# EAGLE board ModulePlatform (EAGLE 7.7.0)
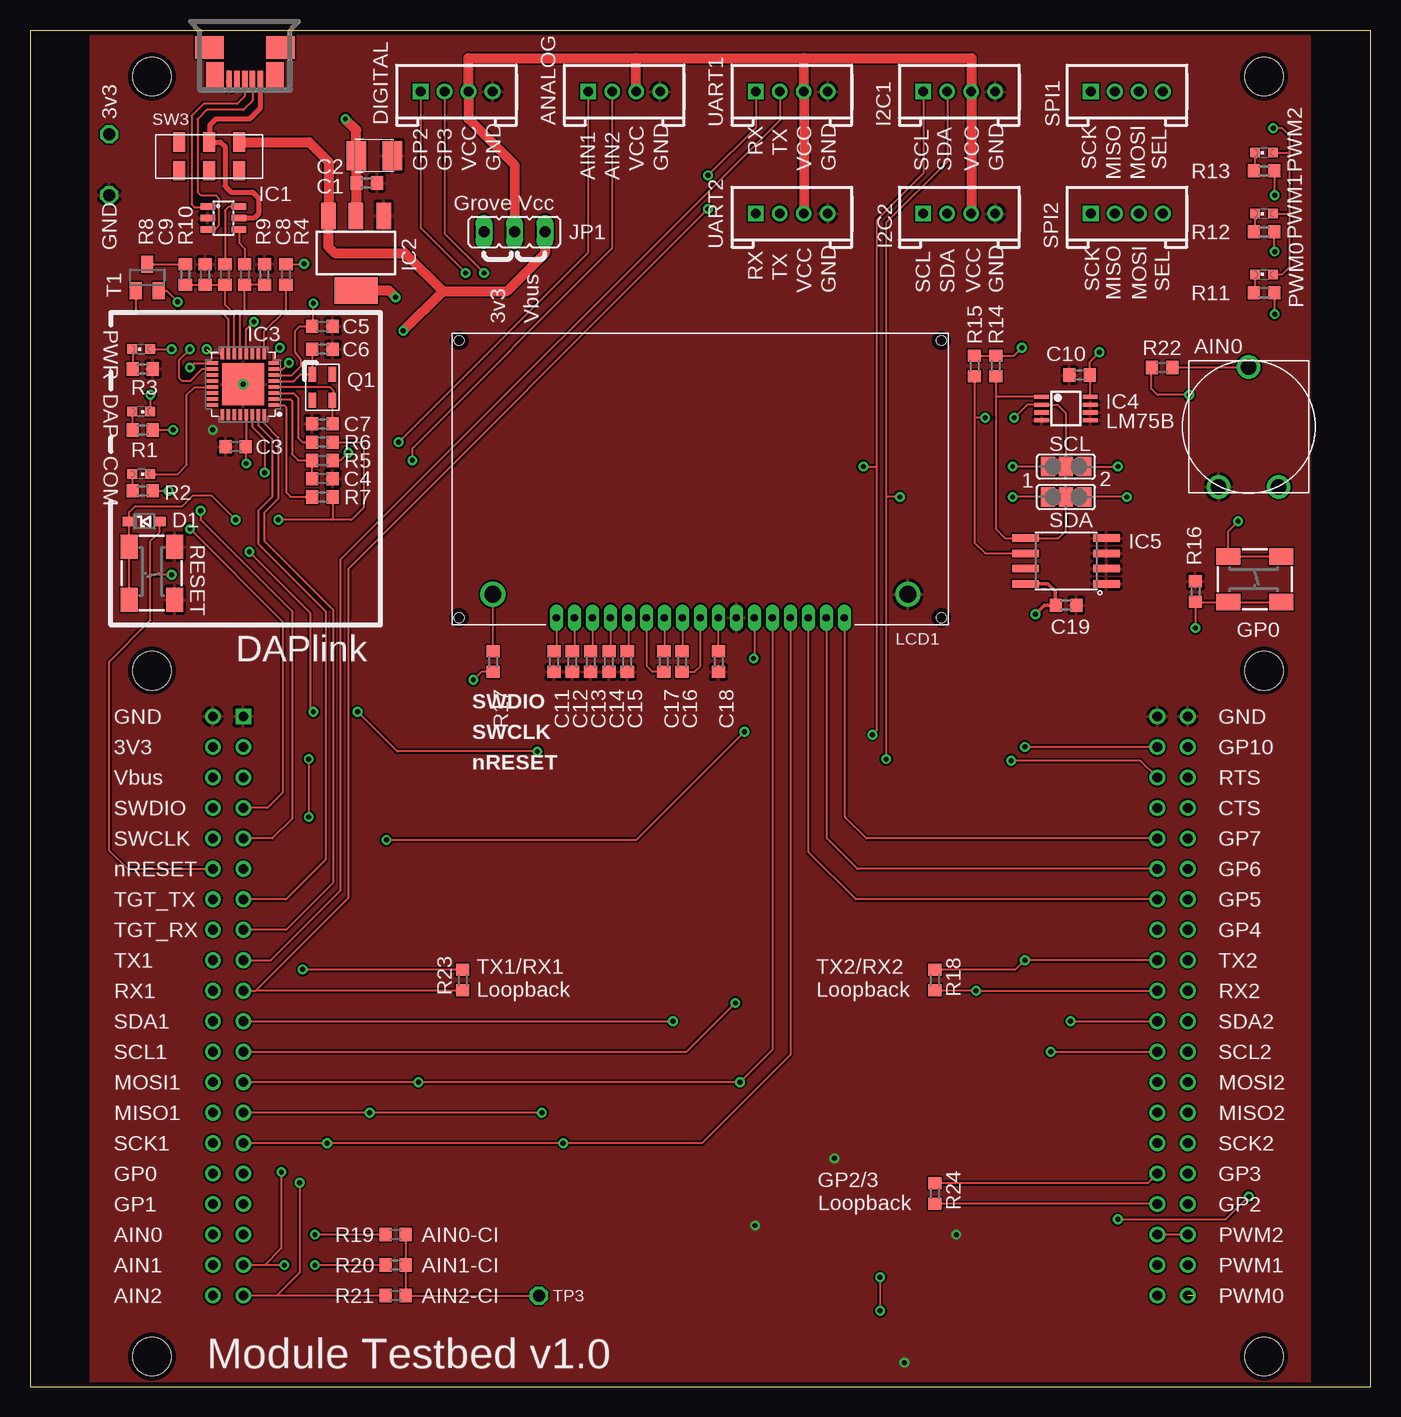
[diagram p0: board, top side]
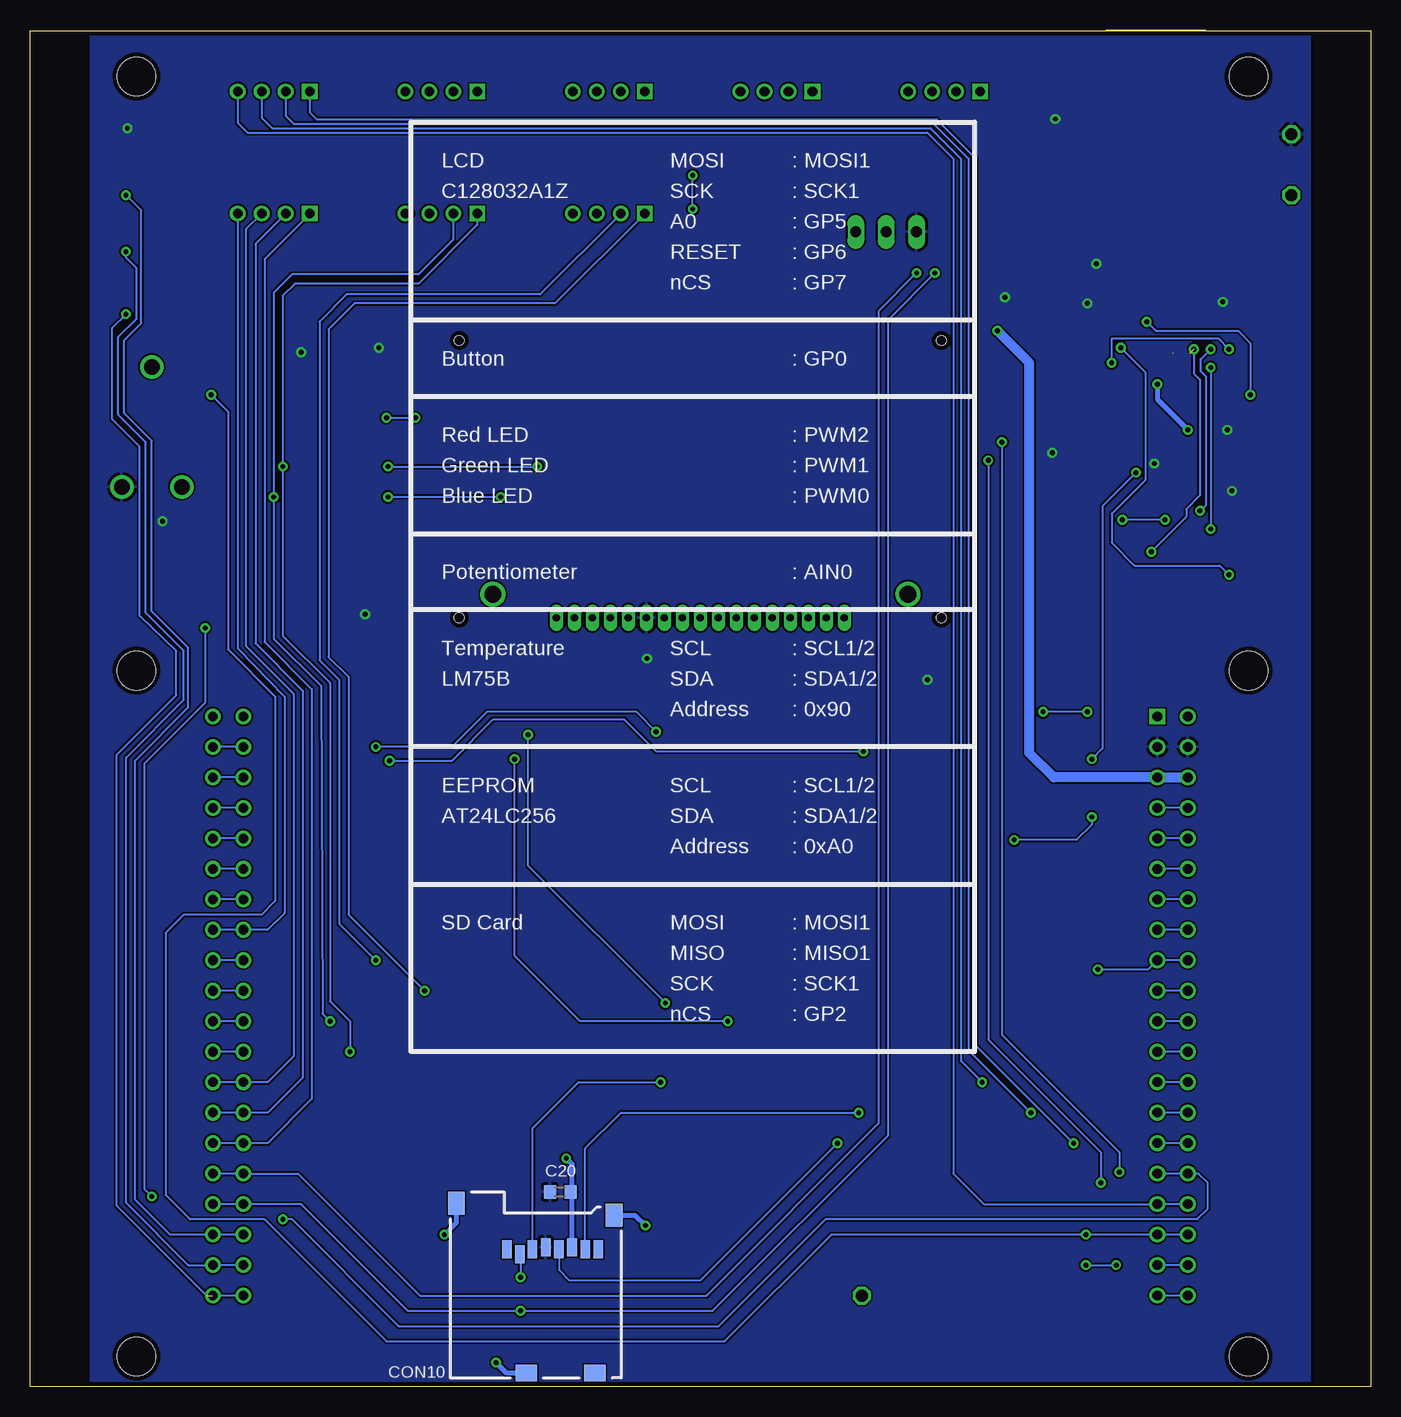
[diagram p1: board, bottom side, seen from below]

Size 111.76 x 113.08 mm. Coordinates in mm from the lower left corner, seen from the top.
Outline: 0,0 111.76,0 111.76,113.03 0,113.03 0,0
Copper layers ((1*16)): Top 0.035mm / dielectric 0.8mm / Bottom 0.035mm
Design rules "mbed-HDK-6-6-2-layer": minimum track width 6mil, minimum drill 9mil, track to track 6mil, track to pad 6mil, pad to pad 6mil, via to via 6mil, smd to smd 6mil, copper to edge 15mil, drill to drill 8mil, minimum pad ring 10mil, minimum via ring 8mil, stop-mask expansion 4mil, vias tented up to drill 0mil, thermal gap 10mil
Holes 3.2 mm at 10.16,2.54 10.16,109.22 102.87,2.54 102.87,109.22 10.16,59.69 102.87,59.69

## Footprints (pad centres in the part's own frame; a part is rotated, then mirrored left to right if it is on the bottom)
0603 = smd 1 x 1.1: 1 -0.85,0; 2 0.85,0
SMC_B = smd 1.6 x 2.4: + -1.5,0; - 1.5,0
HW4-2.0 = drill 0.8 pad 1.27 square: 1 -3,0 | drill 0.8 pad 1.27: 2 -1,0; 3 1,0; 4 3,0
MOLEX-47364-0001 = smd 1.7 x 0.45: 4 2.8,-0.65; D+ 2.8,0; D- 2.8,0.65; GND 2.8,-1.3; VBUS 2.8,1.3 | smd 1.9 x 2.375: GND1 0,2.95; GND4 0,-2.95 | smd 2.1 x 1.475: GND2 2.3,2.5; GND3 2.3,-2.5
AMPHENOL-101-00660-68-6 = smd 0.8 x 1.5: 1 -2.55,10.7; 2 -1.45,10.3; 3 -0.4,10.7; 4 0.7,10.9; 5 1.8,10.7; 6 2.9,10.9; 7 4,10.7; 8 5.1,10.7 | smd 1.8 x 1.4: CD 4.8,0.4; G1 -0.9,0.4 | smd 1.4 x 1.9: G2 6.4,13.55; G3 -6.75,14.55
BAT60A = smd 1 x 0.8: A 1.3,0; K -1.3,0
SOT23-6L = smd 0.55 x 1.2: 1 -0.95,-1.3; 2 0,-1.3; 3 0.95,-1.3; 4 0.95,1.3; 5 0,1.3; 6 -0.95,1.3
SOT223 = smd 1.219 x 2.235: 1 -2.311,-3.099; 2 0,-3.099; 3 2.311,-3.099 | smd 3.6 x 2.2: 4 0,3.099
SOT617-3 = smd 0.9 x 0.29: 1 -2.55,1.75; 2 -2.55,1.25; 3 -2.55,0.75; 4 -2.55,0.25; 5 -2.55,-0.25; 6 -2.55,-0.75; 7 -2.55,-1.25; 8 -2.55,-1.75; 17 2.55,-1.75; 18 2.55,-1.25; 19 2.55,-0.75; 20 2.55,-0.25; 21 2.55,0.25; 22 2.55,0.75; 23 2.55,1.25; 24 2.55,1.75 | smd 0.29 x 0.9: 9 -1.75,-2.55; 10 -1.25,-2.55; 11 -0.75,-2.55; 12 -0.25,-2.55; 13 0.25,-2.55; 14 0.75,-2.55; 15 1.25,-2.55; 16 1.75,-2.55; 25 1.75,2.55; 26 1.25,2.55; 27 0.75,2.55; 28 0.25,2.55; 29 -0.25,2.55; 30 -0.75,2.55; 31 -1.25,2.55; 32 -1.75,2.55 | smd 3.5 x 3.5: 33 0,0
TSSOP8 = smd 1.2 x 0.35: 1 -2.025,0.975; 2 -2.025,0.325; 3 -2.025,-0.325; 4 -2.025,-0.975; 5 2.025,-0.975; 6 2.025,-0.325; 7 2.025,0.325; 8 2.025,0.975
SO08-EIAJ = smd 0.61 x 2.21: 1 -1.905,-3.378; 2 -0.635,-3.378; 3 0.635,-3.378; 4 1.905,-3.378; 5 1.905,3.353; 6 0.635,3.353; 7 -0.635,3.353; 8 -1.905,3.353
JP2 = drill 0.914 long: 1 -2.54,0; 2 0,0; 3 2.54,0
C12832A1Z = drill 1.4: A 3.4,2.55; K 38,2.55 | drill 0.6 long: P$1 8.7,0.6; P$2 10.2,0.6; P$3 11.7,0.6; P$4 13.2,0.6; P$5 14.7,0.6; P$6 16.2,0.6; P$7 17.7,0.6; P$8 19.2,0.6; P$9 20.7,0.6; P$10 22.2,0.6; P$11 23.7,0.6; P$12 25.2,0.6; P$13 26.7,0.6; P$14 28.2,0.6; P$15 29.7,0.6; P$16 31.2,0.6; P$17 32.7,0.6 | hole 0.8: 0.6,0.6; 40.8,0.6; 40.8,23.7; 0.6,23.7
CHIPLED_0603 = smd 0.8 x 0.8: A 0,-0.75; C 0,0.75
3.2X.2.5 = smd 1.27 x 0.635: P$1 -1.092,-0.838; P$2 1.092,-0.838; P$3 1.092,0.838; P$4 -1.092,0.838
0603@1 = smd 1 x 1.1: 1 -0.85,0; 2 0.85,0
SJ_2 = smd 1.168 x 1.6: 1 -1.524,0; 2 0,0; 3 1.524,0
MODULE_SOCKET = drill 0.8 square: 1 0,0 | drill 0.8: 2 0,-2.54; 3 0,-5.08; 4 0,-7.62; 5 0,-10.16; 6 0,-12.7; 7 0,-15.24; 8 0,-17.78; 9 0,-20.32; 10 0,-22.86; 11 0,-25.4; 12 0,-27.94; 13 0,-30.48; 14 0,-33.02; 15 0,-35.56; 16 0,-38.1; 17 0,-40.64; 18 0,-43.18; 19 0,-45.72; 20 0,-48.26; 21 76.2,-48.26; 22 76.2,-45.72; 23 76.2,-43.18; 24 76.2,-40.64; 25 76.2,-38.1; 26 76.2,-35.56; 27 76.2,-33.02; 28 76.2,-30.48; 29 76.2,-27.94; 30 76.2,-25.4; 31 76.2,-22.86; 32 76.2,-20.32; 33 76.2,-17.78; 34 76.2,-15.24; 35 76.2,-12.7; 36 76.2,-10.16; 37 76.2,-7.62; 38 76.2,-5.08; 39 76.2,-2.54; 40 76.2,0; P$41 -2.54,0; P$42 -2.54,-2.54; P$43 -2.54,-5.08; P$44 -2.54,-7.62; P$45 -2.54,-10.16; P$46 -2.54,-12.7; P$47 -2.54,-15.24; P$48 -2.54,-17.78; P$49 -2.54,-20.32; P$50 -2.54,-22.86; P$51 -2.54,-25.4; P$52 -2.54,-27.94; P$53 -2.54,-30.48; P$54 -2.54,-33.02; P$55 -2.54,-35.56; P$56 -2.54,-38.1; P$57 -2.54,-40.64; P$58 -2.54,-43.18; P$59 -2.54,-45.72; P$60 -2.54,-48.26; P$61 78.74,-48.26; P$62 78.74,-45.72; P$63 78.74,-43.18; P$64 78.74,-40.64; P$65 78.74,-38.1; P$66 78.74,-35.56; P$67 78.74,-33.02; P$68 78.74,-30.48; P$69 78.74,-27.94; P$70 78.74,-25.4; P$71 78.74,-22.86; P$72 78.74,-20.32; P$73 78.74,-17.78; P$74 78.74,-15.24; P$75 78.74,-12.7; P$76 78.74,-10.16; P$77 78.74,-7.62; P$78 78.74,-5.08; P$79 78.74,-2.54; P$80 78.74,0
TP-1154X = smd 2 x 1.4: A1 -2.2,1.9; A2 2.2,1.9; B1 -2.2,-1.9; B2 2.2,-1.9
JS202011JCQN = smd 1 x 1.6: 1 0,2.4; 2 2.5,2.4; 3 5,2.4; 5 0,0; 6 2.5,0; 7 5,0
SOT23 = smd 1 x 1.4: 1 -0.95,-1.1; 2 0.95,-1.1; 3 0,1.1
TP50-PTH = drill 1 octagon: TP 0,0
CA14V = drill 1.3: P$1 -2.5,-5; P$2 0,5; P$3 2.5,-5

## Placement (x,y rotation side)
C1  100nF  [0603]  28.07,100.33 0 top
C2  10uF  [SMC_B]  28.7,102.62 0 top
C3  100nF  [0603]  17.15,78.36 180 top
C4  100nF  [0603]  24.38,75.69 0 top
C5  100nF  [0603]  24.38,88.39 0 top
C6  18pF  [0603]  24.38,86.49 0 top
C7  18pF  [0603]  24.38,80.26 180 top
C8  18pF  [0603]  19.56,92.71 90 top
C9  18pF  [0603]  14.61,92.71 90 top
C10  100nF  [0603]  87.5,84.33 180 top
C11  100nF  [0603]  43.69,60.45 270 top
C12  100nF  [0603]  45.21,60.45 270 top
C13  100nF  [0603]  46.74,60.45 270 top
C14  100nF  [0603]  48.26,60.45 270 top
C15  100nF  [0603]  49.78,60.45 270 top
C16  100nF  [0603]  54.36,60.45 90 top
C17  100nF  [0603]  52.83,60.45 270 top
C18  100nF  [0603]  57.4,60.45 270 top
C19  100nF  [0603]  86.36,65.15 0 top
C20  100nF  [0603]  67.56,16.26 0 bottom
CON1  GROVE-SPI-PTH  [HW4-2.0]  91.44,107.95 0 top
CON2  GROVE-UART-I2C-PTH  [HW4-2.0]  63.5,107.95 0 top
CON3  GROVE-A/D-PTH  [HW4-2.0]  49.53,107.95 0 top
CON4  GROVE-A/D-PTH  [HW4-2.0]  35.56,107.95 0 top
CON5  GROVE-UART-I2C-PTH  [HW4-2.0]  77.47,107.95 0 top
CON6  GROVE-UART-I2C-PTH  [HW4-2.0]  63.5,97.79 0 top
CON7  GROVE-SPI-PTH  [HW4-2.0]  91.44,97.79 0 top
CON8  GROVE-UART-I2C-PTH  [HW4-2.0]  77.47,97.79 0 top
CON9  USB_MICROB  [MOLEX-47364-0001]  17.91,111.63 270 top
CON10  MICRO-SD  [AMPHENOL-101-00660-68-6]  69.47,0.76 0 bottom
D1  BAT60A  [BAT60A]  9.53,72.14 0 top
IC1  USBLC6-2SC6  [SOT23-6L]  16.13,97.41 270 top
IC2  LD1117S33  [SOT223]  27.18,94.49 180 top
IC3  LPC11U35FHI33/501  [SOT617-3]  17.78,83.57 180 top
IC4  LM75BD_TSSOP8  [TSSOP8]  86.36,81.53 0 top
IC5  AT24LCXXXEIAJ  [SO08-EIAJ]  86.36,68.83 90 top
JP1  [JP2]  40.39,96.27 180 top
LCD1  C12832A1Z  [C12832A1Z]  35.18,63.5 0 top
LED1  BLUE  [CHIPLED_0603]  9.27,81.28 270 top
LED2  GREEN  [CHIPLED_0603]  9.27,76.07 270 top
LED3  RED  [CHIPLED_0603]  9.27,86.49 90 top
LED4  RED  [CHIPLED_0603]  102.87,92.71 90 top
LED5  BLUE  [CHIPLED_0603]  102.87,97.79 90 top
LED6  GREEN  [CHIPLED_0603]  102.87,102.87 90 top
Q1  12MHz  [3.2X.2.5]  24.38,83.31 270 top
R1  470R  [0603@1]  9.4,79.76 180 top
R2  470R  [0603@1]  9.4,74.68 180 top
R3  470R  [0603@1]  9.4,84.84 180 top
R4  10k  [0603@1]  21.34,92.71 90 top
R5  10k  [0603@1]  24.38,77.22 0 top
R6  33R  [0603@1]  24.38,78.74 0 top
R7  33R  [0603@1]  24.38,74.17 0 top
R8  1k5  [0603@1]  12.95,92.71 270 top
R9  33R  [0603@1]  17.91,92.71 270 top
R10  33R  [0603@1]  16.26,92.71 270 top
R11  1k  [0603]  102.87,91.19 180 top
R12  1k  [0603]  102.87,96.27 180 top
R13  1k  [0603]  102.87,101.35 180 top
R14  4k7  [0603]  80.52,85.09 90 top
R15  4k7  [0603]  78.74,85.09 90 top
R16  220R  [0603]  97.16,66.29 90 top
R17  220R  [0603]  38.61,60.45 90 top
R18  0R  [0603@1]  75.44,33.91 270 top
R19  10k  [0603@1]  30.48,12.7 0 top
R20  10k  [0603@1]  30.48,10.16 0 top
R21  10k  [0603@1]  30.48,7.62 0 top
R22  0R  [0603]  94.36,84.96 180 top
R23  0R  [0603@1]  36.07,33.91 270 top
R24  0R  [0603@1]  75.44,16.13 270 top
SJ1  [SJ_2]  86.36,76.71 0 top
SJ2  [SJ_2]  86.36,74.17 0 top
SKT1  MODULE_SOCKET  [MODULE_SOCKET]  17.78,55.88 0 top
SW1  SPST-4_TP1154_J  [TP-1154X]  10.16,67.82 90 top
SW2  SPST-4_TP1154_J  [TP-1154X]  102.11,67.31 180 top
SW3  JS202011JCQN  [JS202011JCQN]  12.45,101.35 0 top
T1  BSS84  [SOT23]  9.78,92.46 0 top
TP1  TEST-POINT-50R-PTH  [TP50-PTH]  6.6,104.39 0 top
TP2  TEST-POINT-50R-PTH  [TP50-PTH]  6.6,99.31 0 top
TP3  TEST-POINT-50R-PTH  [TP50-PTH]  42.42,7.62 0 top
VR1  ISKRA_PNZ  [CA14V]  101.6,80.01 0 top

## Library data of the parts
C1-C9 C20 CON9 CON10 D1 IC1 IC2 IC5 LED1-LED6 Q1 R1-R10 R18-R21 R23 R24 SW1 SW2 T1 TP1-TP3 = mbed-HDK
C10-C19 R11-R17 R22 = mbed-rlcq
CON1-CON8 JP1 SKT1 = Treadstone
IC3 = mbed-HDK; FLASH: 64kB; GPIO: 26; SRAM: 12kB
IC4 LCD1 VR1 = LabBoard
SJ1 SJ2 = jumper
SW3 = mbed-HDK-Switch; MF: C&K Components; MFN: JS202011JCQN; OC-DIGIKEY: CKN10723CT-ND; OC-MOUSER: 611-JS202011JCQN

## Nets
+3.3V_IF: C1.1 C2.+ C3.1 C5.1 C10.1 C19.1 C20.1 CON10.4 IC2.2 IC2.4 IC3.6 IC3.29 IC4.8 IC5.8 JP1.3 LCD1.P$12 LED4.A LED5.A LED6.A R1.1 R2.1 R4.2 R5.2 R14.2 R15.2 R17.1 SKT1.2 SKT1.P$42 SW2.B1 SW2.B2 T1.2 TP1.TP VR1.P$3
+5V: IC2.3 JP1.1 SKT1.3 SKT1.P$43 SW3.3
AIN0: R19.1 R22.2 SKT1.18 SKT1.P$58
AIN1: CON3.1 R20.1 SKT1.19 SKT1.P$59
AIN2: CON3.2 R21.1 SKT1.20 SKT1.P$60
GND: C1.2 C2.- C3.2 C4.2 C5.2 C6.2 C7.2 C8.2 C9.2 C10.2 C11.2 C12.2 C13.2 C14.2 C15.2 C18.2 C19.2 C20.2 CON2.4 CON3.4 CON4.4 CON5.4 CON6.4 CON8.4 CON9.GND CON10.6 CON10.G1 CON10.G2 CON10.G3 IC1.2 IC2.1 IC3.33 IC4.4 IC4.5 IC4.6 IC4.7 IC5.1 IC5.2 IC5.3 IC5.4 LCD1.K LCD1.P$11 R3.1 R16.2 SKT1.1 SKT1.40 SKT1.P$41 SKT1.P$80 SW1.B1 SW1.B2 TP2.TP VR1.P$1
GP0: R16.1 SKT1.16 SKT1.P$56 SW2.A1 SW2.A2
GP1: CON1.4 SKT1.17 SKT1.P$57
GP2: CON4.1 CON10.2 R24.2 SKT1.24 SKT1.P$64
GP3: CON4.2 R24.1 SKT1.25 SKT1.P$65
GP4: CON7.4 SKT1.33 SKT1.P$73
GP5: LCD1.P$15 SKT1.34 SKT1.P$74
GP6: LCD1.P$16 SKT1.35 SKT1.P$75
GP7: LCD1.P$17 SKT1.36 SKT1.P$76
GP8: SKT1.37 SKT1.P$77
IF_NRESET: C4.1 IC3.2 R5.1
IF_SWCLK: IC3.19
IF_SWDIO: IC3.25
LED_COM_GREEN: IC3.21 LED2.C
LED_DAP_BLUE: IC3.12 LED1.C
LED_PWR_RED: IC3.7 LED3.A
MISO1: CON1.2 CON10.7 SKT1.14 SKT1.P$54
MISO2: CON7.2 SKT1.27 SKT1.P$67
MOSI1: CON1.3 CON10.3 LCD1.P$13 SKT1.13 SKT1.P$53
MOSI2: CON7.3 SKT1.28 SKT1.P$68
N$1: CON9.D+ IC1.1
N$2: CON9.D- IC1.3
N$3: C16.1 LCD1.P$9
N$4: C17.1 LCD1.P$7
N$5: C17.2 LCD1.P$6
N$6: LED2.A R2.2
N$7: IC3.9 R4.1
N$8: C16.2 LCD1.P$8
N$9: LED3.C R3.2
N$10: C6.1 IC3.5 Q1.P$1
N$11: C11.1 LCD1.P$1
N$12: C12.1 LCD1.P$2
N$13: LED1.A R1.2
N$14: C7.1 IC3.4 Q1.P$3
N$15: C13.1 LCD1.P$3
N$16: C14.1 LCD1.P$4
N$17: C15.1 LCD1.P$5
N$18: C18.1 LCD1.P$10
N$19: LED4.C R11.2
N$20: LED6.C R13.2
N$21: LED5.C R12.2
N$22: LCD1.A R17.2
N$23: R8.1 T1.3
N$24: R19.2 R20.2 R21.2 TP3.TP
N$25: R22.1 VR1.P$2
N$27: CON9.VBUS IC1.5 SW3.2
PWM0: R11.1 SKT1.21 SKT1.P$61
PWM1: R12.1 SKT1.22 SKT1.P$62
PWM2: R13.1 SKT1.23 SKT1.P$63
RX1: CON2.1 R23.2 SKT1.10 SKT1.P$50
RX2: CON6.1 R18.2 SKT1.31 SKT1.P$71
SCK1: CON1.1 CON10.5 LCD1.P$14 SKT1.15 SKT1.P$55
SCK2: CON7.1 SKT1.26 SKT1.P$66
SCL: IC4.2 IC5.6 R15.1 SJ1.2
SCL1: CON5.1 SJ1.1 SKT1.12 SKT1.P$52
SCL2: CON8.1 SJ1.3 SKT1.29 SKT1.P$69
SDA: IC4.1 IC5.5 R14.1 SJ2.2
SDA1: CON5.2 SJ2.1 SKT1.11 SKT1.P$51
SDA2: CON8.2 SJ2.3 SKT1.30 SKT1.P$70
TGT_CTS: IC3.30 SKT1.39 SKT1.P$79
TGT_NRESET: D1.A IC3.8 SKT1.6 SKT1.P$46
TGT_NRESET_BUTTON: D1.K R6.2 R7.2 SW1.A1 SW1.A2
TGT_NRESET_FB: IC3.3 R6.1
TGT_NRESET_FB_ISP: IC3.1 R7.1
TGT_RTS: IC3.16 SKT1.38 SKT1.P$78
TGT_RXD: IC3.32 SKT1.8 SKT1.P$48
TGT_SWCLK: IC3.18 SKT1.5 SKT1.P$45
TGT_SWDIO: IC3.17 SKT1.4 SKT1.P$44
TGT_TXD: IC3.31 SKT1.7 SKT1.P$47
TX1: CON2.2 R23.1 SKT1.9 SKT1.P$49
TX2: CON6.2 R18.1 SKT1.32 SKT1.P$72
USB-D+: IC1.6 R10.1
USB-D-: IC1.4 R9.1
USB-SCON: IC3.15 T1.1
USB_DM: C8.1 IC3.13 R9.2
USB_DP: C9.1 IC3.14 R8.2 R10.2
VCC_GROVE: CON2.3 CON3.3 CON4.3 CON5.3 CON6.3 CON8.3 JP1.2

## Tracks (layer width: path | path; a pad name or v marks a point on that pad's centre or on a via)
+3.3V_IF  (via drill 0.41)
  Top 0.152: R4.2 22.82,93.56 v22.86,93.6 | T1.2 11.39,91.36 v12.32,90.42 | R1.1 v11.94,79.76 | R2.1 v11.56,74.68 | IC3.29 18.03,78.39 C3.1 18,77 v18.03,76.96 | v23.62,90.3 23.62,88.48 C5.1 22.48,88.39 22.1,88.01 22.1,86.23 22.61,85.6 22.61,85.09 21.83,84.32 IC3.6 | v100.71,72.14 99.91,71.33 SW2.B2 SW2.B1 | R5.2 25.91,77.22 v26.54,77.85 | R17.1 37.63,59.6 v36.96,58.93 | LCD1.P$12 60.38,60.76 v60.33,60.71 | v89.15,86.23 88.35,85.43 C10.1 88.39,84.3 IC4.8 | R15.2 R14.2 82,85.94 v82.68,86.61 | LED4.A 104.39,92.71 105.03,93.34 105.03,97.79 | 105.03,97.79 105.03,102.87 | 105.03,102.87 105.03,104.27 104.39,104.9 v103.63,104.9 v103.62,104.89 | LED6.A 105.03,102.87 | LED5.A 105.03,97.79
  Top 0.305: IC5.8 84.84,66.93 85.47,66.29 85.47,65.19 C19.1 84.58,65.15 v83.82,64.39
  Top 0.813: IC2.2 27.22,97.63 27.22,99.82 | 27.22,99.82 C1.1 | v26.29,105.66 27.2,104.75 C2.+ 27.2,99.84 27.22,99.82 | IC2.4 29.9,91.39 v30.48,90.8
  pour Bottom: 5.08,0 106.68,0 106.68,113.03 5.08,113.03
+5V  (via drill 0.41)
  Top 0.406: 24.82,97.54 IC2.3
  Top 0.813: JP1.1 42.93,94.49 39.75,91.31 34.42,91.31 | 34.42,91.31 31.24,94.49 25.4,94.49 24.87,95.02 IC2.3 24.89,97.61 24.89,102.11 23.25,103.75 SW3.3 | v31.12,88.01 34.42,91.31
  Bottom 0.813: v31.12,88.01 28.45,85.34 28.45,52.83 26.42,50.8 SKT1.3 SKT1.P$43
AIN0  (via drill 0.41)
  Top 0.152: v96.65,82.68 93.98,82.68 93.47,83.19 93.47,84.92 R22.2 | R19.1 v23.75,12.7
  Bottom 0.152: v96.65,82.68 95.25,81.28 95.25,61.47 91.31,57.53 91.31,40.51 92.46,39.37 98.93,39.37 100.46,37.85 100.46,16 98.43,13.97 92.2,13.97 82.04,3.81 53.85,3.81 44.96,12.7 v23.75,12.7 SKT1.18 SKT1.P$58
AIN1  (via drill 0.41)
  Top 0.152: CON3.1 46.53,94.54 v30.73,78.74 | v20.96,17.91 20.96,11.56 19.56,10.16 | 19.56,10.16 SKT1.19 | R20.1 v23.75,10.16 | v21.21,10.16 19.56,10.16
  Bottom 0.152: v30.73,78.74 30.73,29.34 20.96,19.56 v20.96,17.91 | v23.75,10.16 v21.21,10.16 | SKT1.P$59 SKT1.19
AIN2  (via drill 0.41)
  Top 0.152: CON3.2 48.53,94.88 31.88,78.23 v31.88,77.22 | v22.48,17.02 22.48,9.53 20.57,7.62 | 20.57,7.62 SKT1.20 | R21.1 20.57,7.62
  Bottom 0.152: v31.88,77.22 31.88,28.96 22.48,19.56 v22.48,17.02 | SKT1.P$60 SKT1.20
GND  (via drill 0.41)
  Bottom 0.406: IC3.33 17.78,82.3 v15.24,79.76 | CON10.G3 76.22,13.7 v77.22,12.7 | CON10.G2 61.3,14.31 v60.45,13.46 | CON10.G1 72.03,1.16 v72.9,2.03 | CON10.6 66.57,16.11 | 66.57,16.11 C20.2 | 66.57,16.11 66.57,18.56 v67.06,19.05
  other vias: 17.78,83.57
  pour Top: 5.08,0 5.08,113.03 106.68,113.03 106.68,0
GP0  (via drill 0.41)
  Top 0.152: R16.1 97.16,65.41 | 97.16,65.41 SW2.A2 SW2.A1 | 97.16,65.41 v97.16,63.25 | v90.68,13.97 99.69,13.97 v101.6,15.88
  Bottom 0.152: v97.16,63.25 97.16,57.02 102.23,51.94 102.23,16.51 v101.6,15.88 | v90.68,13.97 89.92,13.97 81.03,5.08 54.36,5.08 45.47,13.97 14.48,13.97 13.59,14.86 13.59,17.02 14.35,17.78 SKT1.P$56 SKT1.16
GP1
  Bottom 0.152: CON1.4 94.44,105.36 93.6,104.52 36.96,104.52 34.8,102.36 34.8,17.78 32.26,15.24 SKT1.17 SKT1.P$57
GP2  (via drill 0.41)
  Top 0.152: CON4.1 32.56,96.6 v36.32,92.84 | SKT1.24 93.94,15.28 R24.2 | v70.87,9.14 v70.87,6.35
  Bottom 0.152: v36.32,92.84 40.26,88.9 40.26,20.95 54.86,6.35 v70.87,6.35 80.26,6.35 89.15,15.24 SKT1.24 SKT1.P$64 | CON10.2 70.87,11.01 v70.87,9.14
GP3  (via drill 0.41)
  Top 0.152: CON4.2 34.56,96.12 v37.85,92.84 | SKT1.25 93.18,16.98 R24.1
  Bottom 0.152: v37.85,92.84 41.02,89.66 41.02,21.97 55.37,7.62 79.25,7.62 89.41,17.78 SKT1.25 SKT1.P$65
GP4
  Bottom 0.152: CON7.4 94.44,61.55 90.55,57.53 90.55,39.5 91.95,38.1 SKT1.33 SKT1.P$73
GP5
  Top 0.152: SKT1.34 68.83,40.64 64.9,44.58 64.9,64.08 LCD1.P$15
  Bottom 0.152: SKT1.34 SKT1.P$74
GP6
  Top 0.152: SKT1.35 68.96,43.18 66.42,45.72 66.42,64.06 LCD1.P$16
  Bottom 0.152: SKT1.35 SKT1.P$75
GP7
  Top 0.152: SKT1.36 69.72,45.72 67.95,47.5 67.95,64.03 LCD1.P$17
  Bottom 0.152: SKT1.36 SKT1.P$76
GP8
  Bottom 0.152: SKT1.37 SKT1.P$77
IF_NRESET
  Top 0.152: C4.1 R5.1 22.35,77.22 21.84,77.72 21.84,82.17 21.7,82.32 IC3.2
LED_COM_GREEN
  Top 0.152: IC3.21 13.72,83.31 13.08,82.68 13.08,76.83 12.32,76.07 LED2.C
LED_DAP_BLUE  (via drill 0.41)
  Top 0.152: IC3.12 18.03,88.13 v18.67,88.77 | v10.03,82.68 10.02,82.66 LED1.C
  Bottom 0.152: v18.67,88.77 17.91,88.01 11.05,88.01 10.03,86.99 v10.03,82.68
LED_PWR_RED  (via drill 0.41)
  Top 0.152: IC3.7 21.06,84.82 v21.59,85.34 | LED3.A v11.81,86.49
  Bottom 0.152: v21.59,85.34 21.59,87.38 12.7,87.38 v11.81,86.49
MISO1  (via drill 0.41)
  Top 0.152: SKT1.14 v28.32,22.86 v42.67,22.86
  Bottom 0.152: CON1.2 90.44,105.93 89.79,105.28 36.45,105.28 33.53,102.36 33.53,28.07 v28.32,22.86 | CON10.7 65.47,19.88 62.48,22.86 v42.67,22.86 | SKT1.P$54 SKT1.14
MISO2
  Bottom 0.152: CON7.2 90.44,97.77 92.96,95.25 92.96,61.98 89.03,58.04 89.03,25.78 91.95,22.86 SKT1.27 SKT1.P$67
MOSI1  (via drill 0.41)
  Top 0.152: SKT1.13 v32.39,25.4 v59.18,25.4 61.88,28.1 LCD1.P$13
  Bottom 0.152: CON1.3 92.44,105.77 91.57,104.9 36.7,104.9 34.16,102.36 34.16,27.18 v32.39,25.4 | CON10.3 69.87,21.57 66.04,25.4 v59.18,25.4 | SKT1.P$53 SKT1.13
MOSI2
  Bottom 0.152: CON7.3 93.73,96.5 93.73,61.72 89.79,57.78 89.79,27.56 91.95,25.4 SKT1.28 SKT1.P$68
N$1
  Top 0.152: CON9.D+ 17.91,107.57 17.27,106.93 14.48,106.93 13.46,105.92 13.46,98.55 13.72,98.3 14.77,98.3 IC1.1
N$2
  Top 0.152: CON9.D- 18.54,108.82 18.54,107.19 17.78,106.43 14.73,106.43 13.97,105.66 13.97,99.57 14.22,99.31 15.49,99.31 15.75,99.06 15.75,96.77 15.43,96.46 IC1.3
N$3
  Top 0.152: C16.1 55.41,59.6 55.88,60.07 LCD1.P$9
N$4
  Top 0.152: LCD1.P$7 52.88,61.35 C17.1
N$5
  Top 0.152: C17.2 51.9,59.6 51.44,60.07 51.44,64.04 LCD1.P$6
N$6
  Top 0.152: R2.2 8.55,76.05 LED2.A
N$7
  Top 0.152: IC3.9 19.53,87.98 21.34,89.79 R4.1
N$8
  Top 0.152: LCD1.P$8 54.38,61.33 C16.2
N$9
  Top 0.152: 8.55,86.46 R3.2
  Top 0.406: LED3.C 8.55,86.46
N$10
  Top 0.152: IC3.5 21.97,83.82 22.55,84.4 Q1.P$1 23.55,86.47 C6.1
N$11
  Top 0.152: LCD1.P$1 43.88,61.49 C11.1
N$12
  Top 0.152: LCD1.P$2 45.38,61.47 C12.1
N$13
  Top 0.152: R1.2 8.55,81.25 LED1.A
N$14
  Top 0.152: C7.1 25.23,82.21 Q1.P$3 25.27,82.27 25.27,83.06 25.02,83.32 IC3.4
N$15
  Top 0.152: LCD1.P$3 46.88,61.44 C13.1
N$16
  Top 0.152: LCD1.P$4 48.38,61.42 C14.1
N$17
  Top 0.152: LCD1.P$5 49.88,61.4 C15.1
N$18
  Top 0.152: C18.1 57.4,64.08 LCD1.P$10
N$19
  Top 0.152: LED4.C 102.12,91.19 R11.2
N$20
  Top 0.152: LED6.C 102.12,101.35 R13.2
N$21
  Top 0.152: LED5.C 102.12,96.27 R12.2
N$22
  Top 0.152: R17.2 38.61,66.02 LCD1.A
N$23
  Top 0.152: T1.3 R8.1
N$24
  Top 0.152: R19.2 R20.2 R21.2 TP3.TP
N$25
  Top 0.152: R22.1 101.55,84.96 VR1.P$2
N$27
  Top 0.406: CON9.VBUS 19.21,106.58 18.29,105.66 15.49,105.66 14.99,105.16 14.99,103.79 SW3.2 15.89,103.75 16.26,103.38 16.26,100.08 16.76,99.57 18.54,99.57 19.05,99.06 19.05,97.79 18.67,97.41 IC1.5
PWM0  (via drill 0.41)  (1 unrouted)
  Top 0.152: v103.76,89.41 103.76,91.15 R11.1
  Bottom 0.152: v103.76,89.41 104.9,88.27 104.9,80.64 102.62,78.36 102.62,64.26 99.57,61.34 99.57,57.66 104.52,52.7 104.52,15.11 97.03,7.62 SKT1.21
PWM1  (via drill 0.41)
  Top 0.152: v103.76,94.61 103.72,94.65 R12.1
  Bottom 0.152: v103.76,94.61 103.76,94.11 102.87,93.22 102.87,89.03 104.39,87.5 104.39,81.03 102.11,78.74 102.11,64.52 98.93,61.34 98.93,57.28 103.76,52.45 103.76,15.37 98.55,10.16 SKT1.P$62 SKT1.22
PWM2  (via drill 0.41)
  Top 0.152: v103.76,99.31 103.76,101.31 R13.1 | SKT1.P$63 SKT1.23
  Bottom 0.152: v103.76,99.31 102.49,98.04 102.49,88.65 103.89,87.25 103.89,81.15 101.6,78.87 101.6,64.64 98.55,61.59 98.55,56.64 103,52.2 103,15.62 100.08,12.7 SKT1.23
RX1  (via drill 0.41)
  Top 0.152: CON2.1 60.5,104.95 v56.52,100.97 | SKT1.10 18.8,33.02 | 18.8,33.02 26.54,40.77 26.54,68.2 v56.52,98.17 | R23.2 36.03,33.02 18.8,33.02
  Bottom 0.152: v56.52,98.17 v56.52,100.97 | SKT1.P$50 SKT1.10
RX2  (via drill 0.41)
  Top 0.152: SKT1.31 v78.87,33.02 75.48,33.02 R18.2
  Bottom 0.152: CON6.1 67.99,90.3 84.71,90.3 86.87,88.14 86.87,60.83 85.22,59.18 85.22,39.37 v78.87,33.02 | SKT1.31 SKT1.P$71
SCK1  (via drill 0.41)
  Top 0.152: LCD1.P$14 63.38,27.69 56.01,20.32 v44.45,20.32 v24.77,20.32 SKT1.15
  Bottom 0.152: CON1.1 88.44,106.22 87.88,105.66 36.2,105.66 32.89,102.36 32.89,28.45 v24.77,20.32 | CON10.5 67.67,9.76 66.8,8.89 55.88,8.89 v44.45,20.32 | SKT1.P$55 SKT1.15
SCK2
  Bottom 0.152: CON7.1 88.44,97.74 92.2,93.98 92.2,62.1 88.27,58.17 88.27,24 91.95,20.32 SKT1.26 SKT1.P$66
SCL  (via drill 0.41)
  Top 0.152: R15.1 78.74,80.77 | 78.74,80.77 78.74,70.36 79.63,69.47 IC5.6 | v82.04,80.77 83.13,81.86 IC4.2 85.65,81.86 86.36,81.15 SJ1.2 | v79.63,80.77 78.74,80.77
  Bottom 0.152: v82.04,80.77 v79.63,80.77
SCL1  (via drill 0.41)
  Top 0.152: CON5.1 74.47,101.14 70.61,97.28 70.61,76.71 | SKT1.12 54.74,27.94 v58.8,32 | v70.23,54.36 70.61,54.74 70.61,76.71 | SJ1.1 v81.92,76.71 | v69.47,76.71 70.61,76.71
  Bottom 0.152: v58.8,32 70.23,43.43 v70.23,54.36 | v81.92,76.71 v69.47,76.71 | SKT1.P$52 SKT1.12
SCL2  (via drill 0.41)
  Top 0.152: v85.09,27.94 SKT1.29 | SJ1.3 v90.68,76.71
  Bottom 0.152: CON8.1 74.47,96.85 79.38,91.95 89.66,91.95 90.68,90.93 v90.68,76.71 90.68,62.61 86.74,58.67 86.74,32.13 85.09,30.48 v85.09,27.94 | SKT1.29 SKT1.P$69
SDA
  Top 0.152: R14.1 80.52,82.55 | 80.52,82.55 80.52,71.5 81.28,70.74 IC5.5 85.72,70.74 86.36,71.37 SJ2.2 | IC4.1 80.56,82.51 80.52,82.55
SDA1  (via drill 0.41)
  Top 0.152: CON5.2 76.47,102.12 71.37,97.03 71.37,74.17 | SKT1.11 v53.59,30.48 | 71.37,74.17 v71.37,52.32 | SJ2.1 v81.92,74.17 | v72.52,74.17 71.37,74.17
  Bottom 0.152: v53.59,30.48 65.91,30.48 71.37,35.94 v71.37,52.32 | v81.92,74.17 v72.52,74.17 | SKT1.P$51 SKT1.11
SDA2  (via drill 0.41)
  Top 0.152: v86.74,30.48 SKT1.30 | v91.44,74.17 SJ2.3
  Bottom 0.152: CON8.2 76.47,95.61 79.38,92.71 89.92,92.71 91.44,91.19 v91.44,74.17 91.44,62.36 87.5,58.42 87.38,31.11 v86.74,30.48 | SKT1.30 SKT1.P$70
TGT_CTS  (via drill 0.41)
  Top 0.152: IC3.30 18.53,80.02 19.56,78.99 v19.56,76.2 | v23.24,52.32 v23.24,47.5 | v29.72,45.59 50.55,45.59 v59.56,54.61 | v82.93,53.34 SKT1.39
  Bottom 0.152: v19.56,76.2 22.35,73.41 22.35,53.21 v23.24,52.32 | v23.24,47.5 23.24,46.86 24.51,45.59 v29.72,45.59 | v59.56,54.61 61.21,56.26 73.66,56.26 76.58,53.34 v82.93,53.34 | SKT1.39 SKT1.P$79
TGT_NRESET  (via drill 0.41)
  Top 0.152: 10.03,67.69 10.03,63.88 6.6,60.45 6.6,44.7 8.13,43.18 SKT1.P$46 | 10.03,67.69 10.03,70.48 10.8,71.25 10.8,72.11 D1.A | IC3.8 20.33,86.12 v20.83,86.61 | v11.81,67.69 10.03,67.69
  Bottom 0.152: v20.83,86.61 18.8,84.58 18.8,75.56 21.59,72.77 21.59,70.36 19.69,68.45 12.57,68.45 v11.81,67.69 | SKT1.P$46 SKT1.6
TGT_NRESET_BUTTON  (via drill 0.41)
  Top 0.152: SW1.A1 SW1.A2 8.26,72.1 | 8.26,72.1 D1.K | R6.2 27.43,78.74 27.81,78.36 27.81,73.28 26.8,72.26 25.15,72.26 | 25.15,72.26 v20.7,72.26 | R7.2 25.23,72.35 25.15,72.26 | 8.26,72.1 8.26,72.9 8.76,73.41 12.7,73.41 13.59,74.3 15.11,74.3 v17.15,72.26
  Bottom 0.152: v17.15,72.26 v20.7,72.26
TGT_NRESET_FB
  Top 0.152: IC3.3 21.96,82.82 22.35,82.42 22.35,79.12 22.73,78.74 R6.1
TGT_NRESET_FB_ISP
  Top 0.152: IC3.1 21.18,81.82 21.34,81.66 21.34,74.55 21.72,74.17 R7.1
TGT_RTS  (via drill 0.41)  (1 unrouted)
  Top 0.152: IC3.16 15.1,86.12 | SKT1.38 92.58,52.2 v81.79,52.2 | v18.29,69.6 23.37,64.52 23.37,56.52 v23.62,56.26 | v42.29,52.96 30.61,52.96 v27.31,56.26
  Bottom 0.152: SKT1.38 SKT1.P$78 | v81.79,52.2 76.58,52.2 73.15,55.63 62.23,55.63 59.56,52.96 v42.29,52.96 | v14.73,86.49 14.73,84.45 14.22,83.95 14.22,74.3 15.37,73.15 15.37,72.52 v18.29,69.6 | v23.62,56.26 v27.31,56.26
TGT_RXD
  Top 0.152: SKT1.8 21.34,38.1 25.27,42.04 25.27,64.77 19.53,70.51 19.53,72.87 20.7,74.04 20.7,79.12 19.53,80.29 IC3.32
  Bottom 0.152: SKT1.P$48 SKT1.8
TGT_SWCLK  (via drill 0.41)
  Top 0.152: SKT1.5 20.19,45.72 21.84,47.37 21.84,64.64 14.22,72.26 v14.22,73.03 | IC3.18 14.33,84.82 13.34,83.82 12.7,83.82 12.45,84.07 12.45,85.6 v13.34,86.49
  Bottom 0.152: v14.22,73.03 13.72,73.53 13.72,84.2 14.16,84.65 14.16,85.66 v13.34,86.49 | SKT1.P$45 SKT1.5
TGT_SWDIO  (via drill 0.41)
  Top 0.152: v13.34,84.96 13.69,85.32 IC3.17 | v13.34,71.5 21.08,63.75 21.08,49.53 19.81,48.26 SKT1.4
  Bottom 0.152: v13.34,84.96 v13.34,71.5 | SKT1.P$44 SKT1.4
TGT_TXD
  Top 0.152: SKT1.7 21.34,40.64 24.64,43.94 24.64,64.64 19.03,70.25 19.03,73 20.19,74.17 20.19,78.99 19.03,80.16 IC3.31
  Bottom 0.152: SKT1.P$47 SKT1.7
TX1  (via drill 0.41)
  Top 0.152: CON2.2 62.5,105.55 25.91,68.96 25.91,41.4 20.07,35.56 SKT1.9 | R23.1 22.77,34.76 v22.73,34.8
  Bottom 0.152: v22.73,34.8 18.54,34.8 SKT1.9 SKT1.P$49
TX2  (via drill 0.41)
  Top 0.152: SKT1.32 v82.93,35.56 82.13,34.76 R18.1
  Bottom 0.152: CON6.2 69.23,91.06 85.34,91.06 87.63,88.77 87.63,60.58 85.98,58.93 85.98,38.61 v82.93,35.56 | SKT1.32 SKT1.P$72
USB-D+
  Top 0.152: IC1.6 16.57,98.36 16.26,98.04 R10.1
USB-D-
  Top 0.152: IC1.4 17.43,95.35 17.91,94.87 R9.1
USB-SCON  (1 unrouted)
  Top 0.152: T1.1 8.83,89.72 9.02,89.53 16,89.53 16.51,89.03 16.51,86.14
USB_DM
  Top 0.152: C8.1 R9.2 17.91,89.79 17.53,89.41 IC3.13
USB_DP
  Top 0.152: R8.2 C9.1 R10.2 16.26,90.17 17.03,89.4 IC3.14
VCC_GROVE
  Top 0.813: 64.52,97.79 CON6.3 CON2.3 64.5,110.74 | 50.53,110.74 36.56,110.74 CON4.3 36.56,105.68 40.39,101.85 JP1.2 | 50.53,110.74 64.5,110.74 | 64.5,110.74 78.49,110.74 78.49,107.95 CON5.3 CON8.3 | CON3.3 50.53,110.74

## Text on the board
tPlace: 3v3 | DIGITAL | ANALOG | UART1 | I2C1 | SPI1 | RX | TX | GP2 | GP3 | VCC | GND | VCC | GND | VCC | GND | SCL | SDA | VCC | GND | SCK | SEL | PWM2 | AIN1 | AIN2 | MISO | MOSI | Grove Vcc | GND | UART2 | I2C2 | SPI2 | PWM1 | RX | TX | VCC | GND | SCL | SDA | VCC | GND | SCK | SEL | MISO | MOSI | PWM0 | PWR | 3v3 | Vbus | AIN0 | DAP | LM75B | SCL | COM | 1 | 2 | SDA | RESET | GP0 | DAPlink | GND | GND | 3V3 | GP10 | Vbus | RTS | SWDIO | CTS | SWCLK | GP7 | nRESET | GP6 | TGT_TX | GP5 | TGT_RX | GP4 | TX1 | TX2 | RX1 | TX1/RX1 / Loopback | TX2/RX2 / Loopback | RX2 | SDA1 | SDA2 | SCL1 | SCL2 | MOSI1 | MOSI2 | MISO1 | MISO2 | SCK1 | SCK2 | GP0 | GP3 | GP2/3 / Loopback | GP1 | GP2 | AIN0 | AIN0-CI | PWM2 | AIN1 | AIN1-CI | PWM1 | AIN2 | AIN2-CI | PWM0 | Module Testbed v1.0
bPlace: : MOSI1 | MOSI | LCD | : SCK1 | SCK | C128032A1Z | : GP5 | A0 | : GP6 | RESET | : GP7 | nCS | : GP0 | Button | : PWM2 | Red LED | : PWM1 | Green LED | : PWM0 | Blue LED | : AIN0 | Potentiometer | : SCL1/2 | SCL | Temperature | : SDA1/2 | SDA | LM75B | : 0x90 | Address | : SCL1/2 | SCL | EEPROM | : SDA1/2 | SDA | AT24LC256 | : 0xA0 | Address | : MOSI1 | MOSI | SD Card | : MISO1 | MISO | : SCK1 | SCK | : GP2 | nCS
TopSilkscreen: SWDIO | SWCLK | nRESET
225bmp: PWR | HID | COM | RESET